# EAGLE board esp_teensy_bridge (EAGLE 9.6.2)
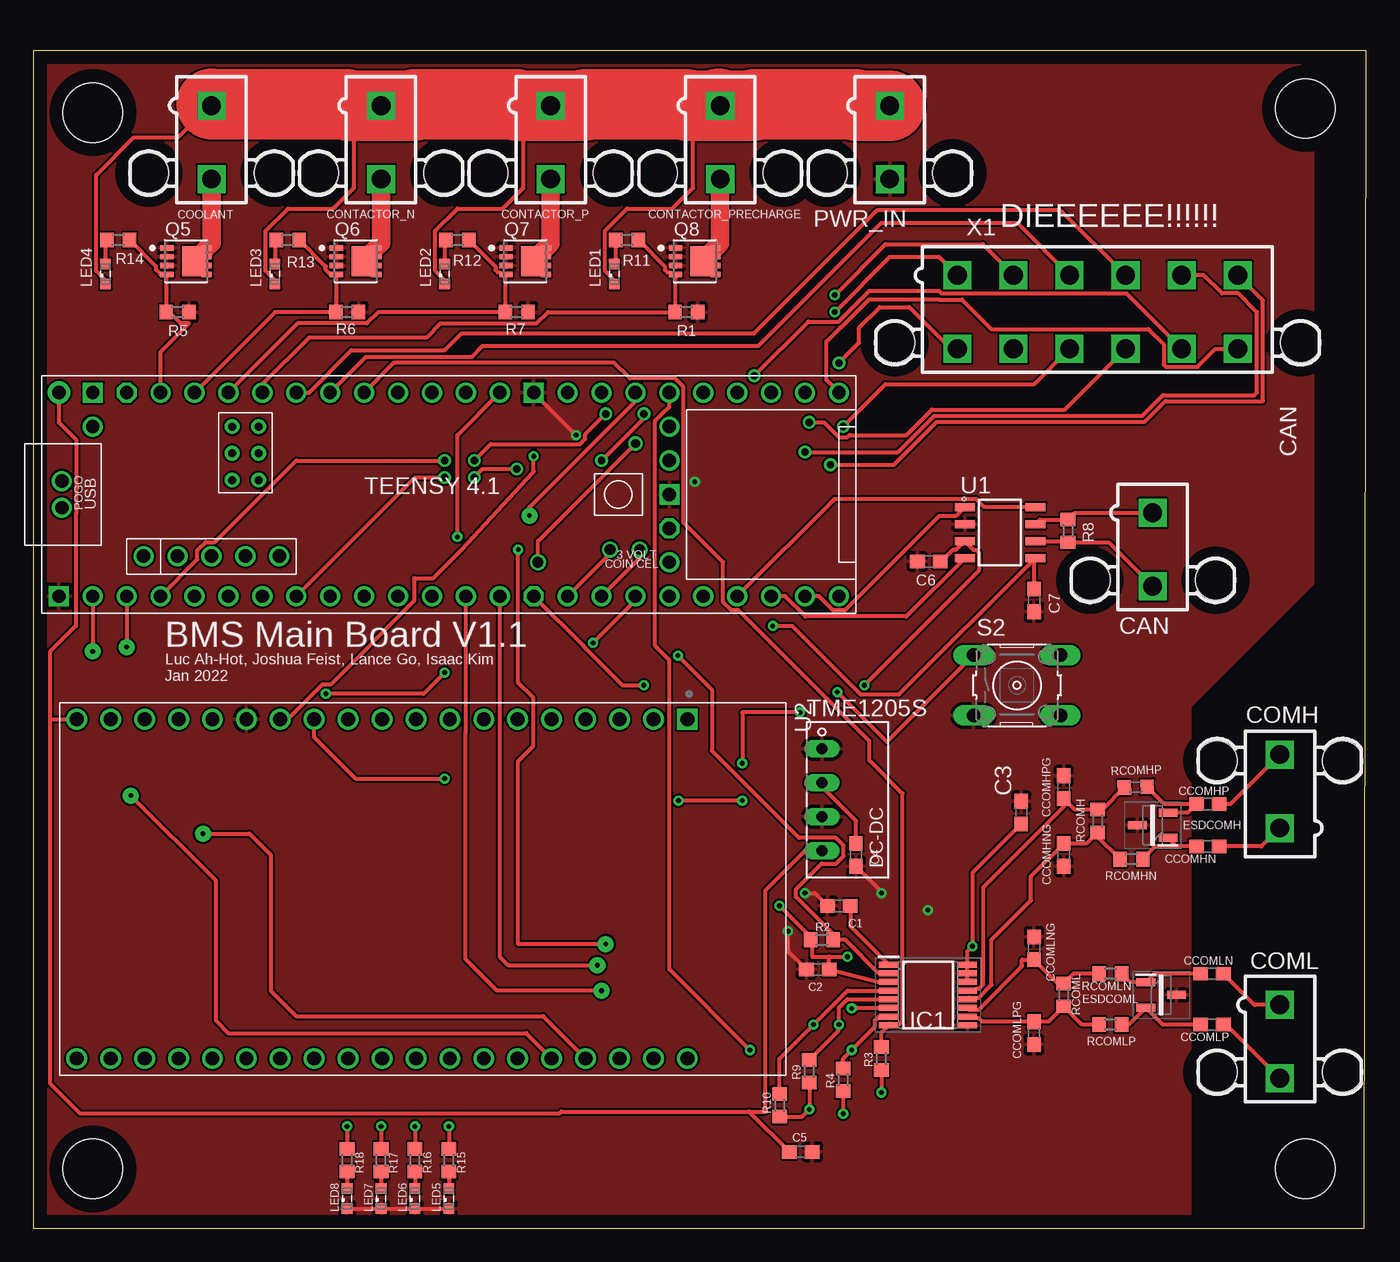
[diagram p0: board, top side]
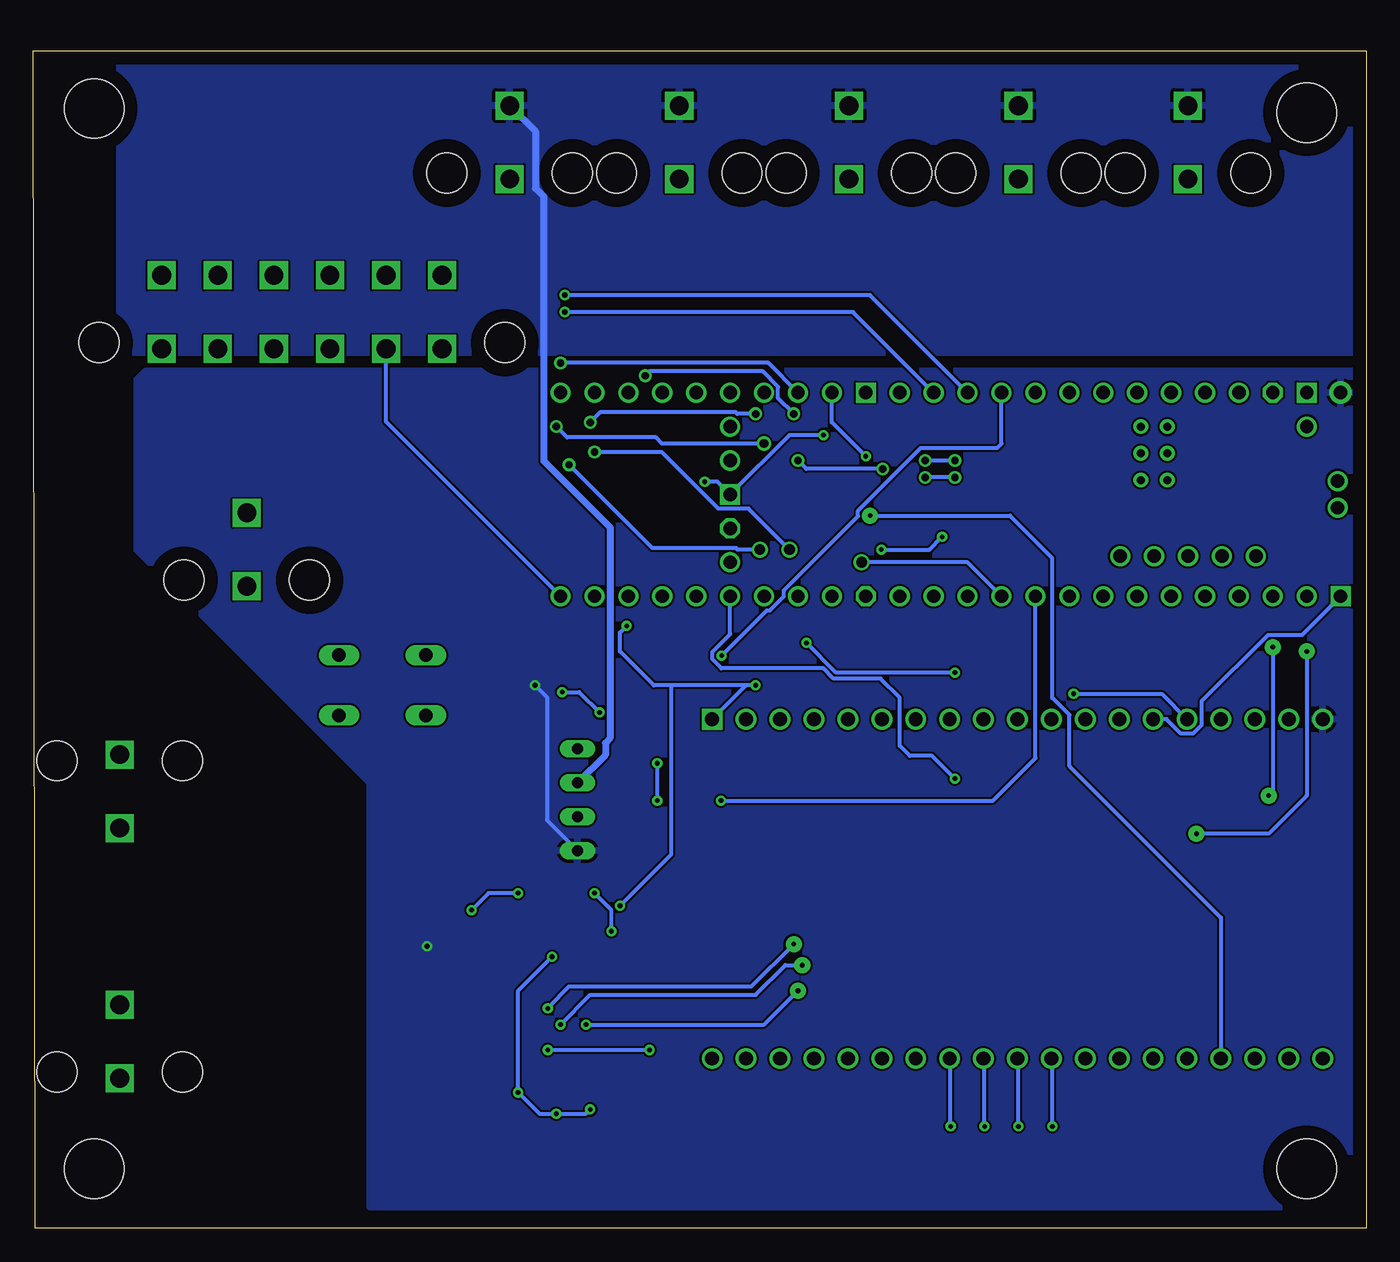
[diagram p1: board, bottom side, seen from below]

Size 99.8 x 88.13 mm. Coordinates in mm from the lower left corner, seen from the top.
Outline: 0,0 99.67,0 99.8,88.13 0,88.13 0,0
Copper layers (1*16): Top 0.035mm / dielectric 1.5mm / Bottom 0.035mm
Design rules "default *": minimum track width 6mil, minimum drill 0.35mm, track to track 6mil, track to pad 6mil, pad to pad 6mil, via to via 6mil, smd to smd 6mil, copper to edge 40mil, drill to drill 6mil, minimum pad ring 10mil, minimum via ring 8mil, stop-mask expansion 4mil, vias tented up to drill 0mil, thermal gap 10mil
Holes 4.45 mm at 4.45,4.45 95.25,4.45 95.25,83.82 4.45,83.5

## Footprints (pad centres in the part's own frame; a part is rotated, then mirrored left to right if it is on the bottom)
C0603 = smd 1.1 x 1: 1 -0.85,0; 2 0.85,0
5566-2 = drill 1.4 square: 1 0,-2.75; 2 0,2.75 | hole 3: 4.7,2.29; -4.7,2.29
SOT95P255X150-3N = smd 1.4 x 0.6: 1 -1.15,0.95; 2 -1.15,-0.95; 3 1.15,0
SOP65P640X120-16N = smd 1.475 x 0.45: 1 -2.938,2.275; 2 -2.938,1.625; 3 -2.938,0.975; 4 -2.938,0.325; 5 -2.938,-0.325; 6 -2.938,-0.975; 7 -2.938,-1.625; 8 -2.938,-2.275; 9 2.938,-2.275; 10 2.938,-1.625; 11 2.938,-0.975; 12 2.938,-0.325; 13 2.938,0.325; 14 2.938,0.975; 15 2.938,1.625; 16 2.938,2.275
SML0603 = smd 0.8 x 0.8: A 0.75,0; C -0.75,0
VISHAY_SIS862DN-T1-GE3_0 = smd 0.99 x 0.405: 1 -1.435,0.99; 2 -1.435,0.33; 3 -1.435,-0.33; 4 -1.435,-0.99 | smd 0.76 x 0.405: 5,6,7,8 1.55,-0.99; 5,6,7,8-2 1.55,-0.33; 5,6,7,8-3 1.55,0.33; 5,6,7,8-4 1.55,0.99 | smd 1.725 x 2.235: 5,6,7,8-5 0.557,0
R0603 = smd 1 x 1.1: 1 -0.85,0; 2 0.85,0
B3F-10XX = drill 1.016 long: 1 -3.251,2.261; 2 3.251,2.261; 3 -3.251,-2.261; 4 3.251,-2.261
NME = drill 0.813 long: 1 0,3.81; 2 0,1.27; 3 0,-1.27; 4 0,-3.81
SOIC127P600X175-8N = smd 1.5 x 0.6: 1 -2.65,1.905; 2 -2.65,0.635; 3 -2.65,-0.635; 4 -2.65,-1.905; 5 2.65,-1.905; 6 2.65,-0.635; 7 2.65,0.635; 8 2.65,1.905
MODULE_ESP32-DEVKITC-32D = drill 1.04 square: 1 -12.7,19.76 | drill 1.04: 2 -12.7,17.22; 3 -12.7,14.68; 4 -12.7,12.14; 5 -12.7,9.6; 6 -12.7,7.06; 7 -12.7,4.52; 8 -12.7,1.98; 9 -12.7,-0.56; 10 -12.7,-3.1; 11 -12.7,-5.64; 12 -12.7,-8.18; 13 -12.7,-10.72; 14 -12.7,-13.26; 15 -12.7,-15.8; 16 -12.7,-18.34; 17 -12.7,-20.88; 18 -12.7,-23.42; 19 -12.7,-25.96; 20 12.7,19.76; 21 12.7,17.22; 22 12.7,14.68; 23 12.7,12.14; 24 12.7,9.6; 25 12.7,7.06; 26 12.7,4.52; 27 12.7,1.98; 28 12.7,-0.56; 29 12.7,-3.1; 30 12.7,-5.64; 31 12.7,-8.18; 32 12.7,-10.72; 33 12.7,-13.26; 34 12.7,-15.8; 35 12.7,-18.34; 36 12.7,-20.88; 37 12.7,-23.42; 38 12.7,-25.96
TEENSY41 = drill 1: 0-RX1/CS1/CRX2 -27.94,-7.62; 1-TX1/MISO1/CTX2 -25.4,-7.62; 2-OUT2 -22.86,-7.62; 3-LRCLK2 -20.32,-7.62; 4-BCLK2 -17.78,-7.62; 5-IN2 -15.24,-7.62; 6-OUT1D -12.7,-7.62; 7-RX2/OUT1A -10.16,-7.62; 8-TX2/IN1 -7.62,-7.62; 9-OUT1C -5.08,-7.62; 10-CS\MQSR -2.54,-7.62; 11-MOSI/CTX1 0,-7.62; 12-MISO/MQSL 2.54,-7.62; 13-SCK/LED 2.54,7.62; 14-A0/TX3/SPDIF_OUT 0,7.62; 15-A1/RX3/SPDIF_IN -2.54,7.62; 16-A2/RX4/SCL1 -5.08,7.62; 17-A3/TX4/SDA1 -7.62,7.62; 18-A4/SDA0 -10.16,7.62; 19-A5/SCL0 -12.7,7.62; 20-A6/TX5/LRCLK1 -15.24,7.62; 21-A7/RX5/BCLK1 -17.78,7.62; 22-A8/CTX1 -20.32,7.62; 23-A9/CRX1/MCLK1 -22.86,7.62; 24-A10/TX6/SCL2 7.62,-7.62; 25-A11/RX6/SDA2 10.16,-7.62; 26-A12/MOSI1 12.7,-7.62; 27-A13/SCK1 15.24,-7.62; 28-RX7 17.78,-7.62; 29-TX7 20.32,-7.62; 30-CRX3 22.86,-7.62; 31-CTX3 25.4,-7.62; 32-OUT1B 27.94,-7.62; 33-MCLK2 27.94,7.62; 34-RX8 25.4,7.62; 35-TX8 22.86,7.62; 36-PWM 20.32,7.62; 37-PWM 17.78,7.62; 38-A14/CS/IN1 15.24,7.62; 39-A15/CS/OUT1A 12.7,7.62; 40-A16/CS1 10.16,7.62; 41-A17/MISO1 7.62,7.62; +5V -24.13,-4.62; D+ -30.25,-1; D- -30.25,1; DM -21.59,-4.62; DP -19.05,-4.62; GND4 -16.51,-4.62; GND5 -13.97,-4.62; ON/OFF 15.24,5.08; PROGRAM 15.24,2.54; VBAT 15.24,-5.08; VUSB -27.94,5.08 | drill 1 octagon: 3V3-1 5.08,-7.62; 3V3-2 15.24,-2.54; 3V3-3 -25.4,7.62 | drill 0.6: G -15.51,3.08; LED -17.51,3.08; R+ -17.51,5.08; R- -15.51,5.08; T+ -15.51,1.08; T- -17.51,1.08 | drill 1 square: GND1 -30.48,-7.62; GND2 15.24,0; GND3 5.08,7.62; GND6 -27.94,7.62 | drill 1 pad 1.676: VIN -30.48,7.62
5566-12 = drill 1.4 square: 1 10.5,-2.75; 2 6.3,-2.75; 3 2.1,-2.75; 4 -2.1,-2.75; 5 -6.3,-2.75; 6 -10.5,-2.75; 7 10.5,2.75; 8 6.3,2.75; 9 2.1,2.75; 10 -2.1,2.75; 11 -6.3,2.75; 12 -10.5,2.75 | hole 3: 15.2,2.29; -15.2,2.29

## Placement (x,y rotation side)
C1  0.22μF  [C0603]  60.33,24.13 180 top
C2  0.1μF  [C0603]  58.74,19.37 180 top
C3  0.22uF  [C0603]  73.98,31.11 270 top
C4  0.1μF  [C0603]  61.59,27.94 270 top
C5  0.22μF  [C0603]  57.47,5.71 0 top
C6  0.1μF  [C0603]  67.06,49.91 180 top
C7  0.1μF  [C0603]  74.93,46.99 270 top
CAN  5566-2  [5566-2]  83.82,50.8 180 top
CCOMHN  2.2nf  [C0603]  87.95,28.57 180 top
CCOMHNG  220 pF  [C0603]  77.15,27.94 90 top
CCOMHP  2.2nf  [C0603]  87.95,31.75 180 top
CCOMHPG  220 pF  [C0603]  77.15,33.02 270 top
CCOMLN  2.2nf  [C0603]  88.27,19.05 180 top
CCOMLNG  220 pF  [C0603]  74.93,20.95 270 top
CCOMLP  2.2nf  [C0603]  88.27,15.24 180 top
CCOMLPG  220 pF  [C0603]  74.93,14.61 90 top
COMH  5566-2  [5566-2]  93.34,32.7 0 top
COML  5566-2  [5566-2]  93.34,13.97 180 top
CONTACTOR_N  5566-2  [5566-2]  26.04,81.28 180 top
CONTACTOR_P  5566-2  [5566-2]  38.73,81.28 180 top
CONTACTOR_PRECHARGE  5566-2  [5566-2]  51.44,81.28 180 top
COOLANT  5566-2  [5566-2]  13.34,81.28 180 top
ESDCOMH  ESDAVLC6-2BLY  [SOT95P255X150-3N]  83.82,30.16 180 top
ESDCOML  ESDAVLC6-2BLY  [SOT95P255X150-3N]  84.45,17.46 0 top
IC1  BQ79600PWRQ1  [SOP65P640X120-16N]  66.99,17.46 0 top
LED1  [SML0603]  43.5,71.44 90 top
LED2  [SML0603]  30.8,71.44 90 top
LED3  [SML0603]  18.1,71.44 90 top
LED4  [SML0603]  5.4,71.44 90 top
LED5  [SML0603]  31.11,2.22 90 top
LED6  [SML0603]  28.57,2.22 90 top
LED7  [SML0603]  26.04,2.22 90 top
LED8  [SML0603]  23.5,2.22 90 top
PWR_IN  5566-2  [5566-2]  64.14,81.28 180 top
Q5  VISHAY_SIS862DN-T1-GE3VISHAY_SIS862DN-T1-GE3_0_0  [VISHAY_SIS862DN-T1-GE3_0]  11.43,72.39 0 top
Q6  VISHAY_SIS862DN-T1-GE3VISHAY_SIS862DN-T1-GE3_0_0  [VISHAY_SIS862DN-T1-GE3_0]  24.13,72.39 0 top
Q7  VISHAY_SIS862DN-T1-GE3VISHAY_SIS862DN-T1-GE3_0_0  [VISHAY_SIS862DN-T1-GE3_0]  36.83,72.39 0 top
Q8  VISHAY_SIS862DN-T1-GE3VISHAY_SIS862DN-T1-GE3_0_0  [VISHAY_SIS862DN-T1-GE3_0]  49.53,72.39 0 top
R1  10k  [R0603]  48.9,68.58 180 top
R2  100k  [R0603]  59.05,21.59 0 top
R3  100k  [R0603]  63.5,12.7 90 top
R4  10k  [R0603]  60.64,11.11 90 top
R5  10k  [R0603]  10.79,68.58 180 top
R6  10k  [R0603]  23.5,68.58 180 top
R7  10k  [R0603]  36.2,68.58 180 top
R8  120  [R0603]  77.47,52.2 270 top
R9  10k  [R0603]  58.1,11.75 90 top
R10  10k  [R0603]  55.88,9.21 90 top
R11  10k  [R0603]  44.45,73.98 180 top
R12  10k  [R0603]  31.75,73.98 180 top
R13  10k  [R0603]  19.05,73.98 180 top
R14  10k  [R0603]  6.35,73.98 180 top
R15  50  [R0603]  31.11,5.08 270 top
R16  50  [R0603]  28.57,5.08 270 top
R17  50  [R0603]  26.04,5.08 270 top
R18  50  [R0603]  23.5,5.08 270 top
RCOMH  1k  [R0603]  79.69,30.48 90 top
RCOMHN  49  [R0603]  82.23,27.62 180 top
RCOMHP  49  [R0603]  82.55,33.02 181.8 top
RCOML  1k  [R0603]  77.15,17.46 270 top
RCOMLN  49  [R0603]  80.64,19.05 180 top
RCOMLP  49  [R0603]  80.64,15.24 180 top
S2  [B3F-10XX]  73.66,40.64 0 top
TME1205S  [NME]  59.05,32.07 0 top
U1  MCP2562-E/SN  [SOIC127P600X175-8N]  72.39,52.07 0 top
U2  ESP32-DEVKITC-32D  [MODULE_ESP32-DEVKITC-32D]  29.21,25.4 270 top
U$3  TEENSY41  [TEENSY41]  32.38,54.93 0 top
X1  5566-12  [5566-12]  79.69,68.58 180 top

## Library data of the parts
C1-C7 CCOMHN CCOMHNG CCOMHP CCOMHPG CCOMLN CCOMLNG CCOMLP CCOMLPG = rcl; SPICEPREFIX: C
CAN COMH COML CONTACTOR_N CONTACTOR_P CONTACTOR_PRECHARGE COOLANT PWR_IN = con-molex; MF: MOLEX; OC_FARNELL: 1822072; OC_NEWARK: unknown
ESDCOMH ESDCOML = ESDAVLC6-2BLY; DESCRIPTION: STMICROELECTRONICS - ESDAVLC6-2BLY - ESD Protection Device, 17 V, SOT-23, 3 Pins, 5 V, 140 W, ESDA Transil Series; HEIGHT: 1.5mm; MANUFACTURER_NAME: STMicroelectronics; MANUFACTURER_PART_NUMBER: ESDAVLC6-2BLY; MOUSER_PART_NUMBER: 511-ESDAVLC6-2BLY; MOUSER_PRICE-STOCK: https://www.mouser.co.uk/ProductDetail/STMicroelectronics/ESDAVLC6-2BLY?qs=l7cgNqFNU1iH2e21evvYsA%3D%3D
IC1 = BQ79600; DESCRIPTION: Battery Management Automotive SPI/UART communication interface functional-safety compliant with automatic host wakeup; HEIGHT: 1.2mm; MANUFACTURER_NAME: Texas Instruments; MANUFACTURER_PART_NUMBER: BQ79600PWRQ1; MOUSER_PART_NUMBER: 595-BQ79600PWRQ1; MOUSER_PRICE-STOCK: https://www.mouser.co.uk/ProductDetail/Texas-Instruments/BQ79600PWRQ1?qs=bAKSY%2FctAC74v4PXQeVHrA%3D%3D
LED1-LED8 = led
Q5-Q8 = Vishay - SIS862DN-T1-GE3; CENTROID_NOT_SPECIFIED: No; CONTINUOUS_DRAIN_CURRENT: 40A; DATASHEET: http://www.vishay.com/docs/63346/sis862dn.pdf; DEVICE_CLASS_L1: Discrete Semiconductors; DEVICE_CLASS_L2: Transistors; DEVICE_CLASS_L3: MOSFETs; DIGIKEY_DESCRIPTION: TRANS MOSFET N-CH 60V 40A 1212; DIGIKEY_PART_NUMBER: SIS862DN-T1-GE3CT-ND; DRAIN_TO_SOURCE_BREAKDOWN_VOLTAGE: 60V; DRAIN_TO_SOURCE_RESISTANCE: 0.007Ω; DRAIN_TO_SOURCE_VOLTAGE: 60V; GATE_TO_SOURCE_VOLTAGE: 20V; HEIGHT: 1.12mm; INPUT_CAPACITACE_AT_VDS: 1320pF @ 30V; LEAD_FREE: yes; MAX_JUNCTION_TEMP: +150°C; MF: Vishay; MFG_PACKAGE_IDENT: S16-2667; MFG_PACKAGE_IDENT_DATE: 01/2017; MFG_PACKAGE_IDENT_REV: M; MOUSER_DESCRIPTION: N-Channel 60 V 8.5 mOhm 52 W TrenchFET Power Mosfet - PowerPAK 1212-8; MOUSER_PART_NUMBER: 78-SIS862DN-T1-GE3; MPN: SIS862DN-T1-GE3; NUMBER_OF_CHANNELS: 1; NUMBER_OF_N_CHANNELS: 1; PACKAGE: PowerPAK1212-8; POWER_DISSIPATION: 52W; PREFIX: Q; ROHS: yes; STANDOFF_HEIGHT: 0mm; TECHNOLOGY: MOSFET; TEMPERATURE_RANGE_HIGH: +150°C; TEMPERATURE_RANGE_LOW: -55°C; THRESHOLD_VGS: 2.6V; TURN_OFF_DELAY_TIME: 15ns; TURN_ON_DELAY_TIME: 23ns; VERIFICATION_VERSION: 0.0.0.1
R1-R18 RCOMH RCOMHN RCOMHP RCOML RCOMLN RCOMLP = rcl; SPICEPREFIX: R
S2 = switch-omron; MPN: B3F-1000; OC_FARNELL: 176432; OC_NEWARK: 36M3542
TME1205S = dc-dc-converter; MF: C & D TECHNOLOGIES, INC; MPN: NME1205D; OC_FARNELL: 1021466; OC_NEWARK: 98B8198
U1 = MCP2562-E_SN; AVAILABILITY: In Stock; DESCRIPTION: Microchip MCP2562-E/SN, CAN Transceiver 1MBps 1-channel IEC 61000-4-2, 8-Pin SOIC; MF: Microchip; MP: MCP2562-E/SN; PACKAGE: SO-8 Microchip; PRICE: None; PURCHASE-URL: https://pricing.snapeda.com/search/part/MCP2562-E/SN/?ref=eda
U2 = ESP32-DEVKITC-32D; AVAILABILITY: In Stock; DESCRIPTION: WiFi Development Tools (802.11) ESP32 General Development Kit, ESP32-WROOM-32D on the board; MF: Espressif Systems; MP: ESP32-DEVKITC-32D; PACKAGE: None; PRICE: None; PURCHASE-URL: https://pricing.snapeda.com/search/part/ESP32-DEVKITC-32D/?ref=eda
U$3 = teensy
X1 = con-molex; MF: MOLEX; OC_FARNELL: unknown; OC_NEWARK: unknown

## Nets
3V3: C2.1 C7.1 IC1.3 R2.1 R3.1 R4.1 R9.1 R10.1 U1.5 U2.1 U$3.3V3-1
5V: C3.2 C5.1 C6.1 IC1.14 IC1.15 IC1.16 TME1205S.4 U1.3 U2.19 U$3.VIN
CANH: CAN.1 R8.1 U1.7
CANL: CAN.2 R8.2 U1.6
COMHN: CCOMHNG.2 IC1.12 RCOMH.1 RCOMHN.2
COMHN_ISO: CCOMHN.1 COMH.1
COMHP: CCOMHPG.2 IC1.13 RCOMH.2 RCOMHP.2
COMHP_ISO: CCOMHP.1 COMH.2
COMLN: CCOMLNG.2 IC1.11 RCOML.1 RCOMLN.2
COMLN_ISO: CCOMLN.1 COML.1
COMLP: CCOMLPG.2 IC1.10 RCOML.2 RCOMLP.2
COMLP_ISO: CCOMLP.1 COML.2
CONTACTORN_CTRL: Q6.4 R6.2 R13.1 U$3.22-A8/CTX1
CONTACTORP_CTRL: Q7.4 R7.2 R12.1 U$3.21-A7/RX5/BCLK1
CONTACTORPRECHARGE_CTRL: Q8.4 R1.2 R11.1 U$3.20-A6/TX5/LRCLK1
COOLANT_CTRL: Q5.4 R5.2 R14.1 U$3.23-A9/CRX1/MCLK1
CRX: U1.4 U$3.30-CRX3
CS0: IC1.7 R4.2 U$3.38-A14/CS/IN1
CS1: U2.35 U$3.39-A15/CS/OUT1A
CSTBY: U1.8 U$3.29-TX7
CTX: U1.1 U$3.31-CTX3
GND: C1.2 C2.2 C3.1 C4.2 C5.2 C6.2 C7.2 CCOMHNG.1 CCOMHPG.1 CCOMLNG.1 CCOMLPG.1 ESDCOMH.3 ESDCOML.3 IC1.9 LED5.C LED6.C LED7.C LED8.C PWR_IN.2 Q5.1 Q5.2 Q5.3 Q6.1 Q6.2 Q6.3 Q7.1 Q7.2 Q7.3 Q8.1 Q8.2 Q8.3 R1.1 R5.1 R6.1 R7.1 S2.3 TME1205S.1 TME1205S.3 U1.2 U2.14 U$3.GND1 U$3.GND2 U$3.GND3
GND2: U2.26
GND3: U2.20
MISO: IC1.5 R9.2 U$3.12-MISO/MQSL
MISO_ESP: U2.13 U$3.41-A17/MISO1
MOSI: IC1.4 R10.2 U$3.11-MOSI/CTX1
MOSI_ESP: U2.15 U$3.26-A12/MOSI1
N$1: C1.1 IC1.1
N$2: CONTACTOR_N.2 Q6.5,6,7,8 Q6.5,6,7,8-2 Q6.5,6,7,8-3 Q6.5,6,7,8-4 Q6.5,6,7,8-5
N$3: LED1.A R11.2
N$4: LED2.A R12.2
N$5: COOLANT.2 Q5.5,6,7,8 Q5.5,6,7,8-2 Q5.5,6,7,8-3 Q5.5,6,7,8-4 Q5.5,6,7,8-5
N$6: CONTACTOR_PRECHARGE.2 Q8.5,6,7,8 Q8.5,6,7,8-2 Q8.5,6,7,8-3 Q8.5,6,7,8-4 Q8.5,6,7,8-5
N$7: S2.1 U$3.8-TX2/IN1
N$9: LED3.A R13.2
N$10: CCOMLP.2 ESDCOML.2 RCOMLP.1
N$11: CCOMLN.2 ESDCOML.1 RCOMLN.1
N$12: CONTACTOR_P.2 Q7.5,6,7,8 Q7.5,6,7,8-2 Q7.5,6,7,8-3 Q7.5,6,7,8-4 Q7.5,6,7,8-5
N$13: LED4.A R14.2
N$14: U$3.14-A0/TX3/SPDIF_OUT X1.1
N$15: CCOMHP.2 ESDCOMH.2 RCOMHP.1
N$16: CCOMHN.2 ESDCOMH.1 RCOMHN.1
N$17: U$3.15-A1/RX3/SPDIF_IN X1.2
N$18: U$3.18-A4/SDA0 X1.3
N$19: U$3.19-A5/SCL0 X1.4
N$20: U$3.24-A10/TX6/SCL2 X1.5
N$21: U$3.25-A11/RX6/SDA2 X1.6
N$22: U$3.40-A16/CS1 X1.7
N$23: U$3.32-OUT1B X1.8
N$24: U$3.9-OUT1C X1.9
N$25: U$3.6-OUT1D X1.10
N$26: U$3.33-MCLK2 X1.12
N$27: U$3.2-OUT2 X1.11
N$28: R15.1 U2.27
N$29: R16.1 U2.28
N$30: R17.1 U2.29
N$31: R18.1 U2.30
N$32: LED5.A R15.2
N$33: LED6.A R16.2
N$34: LED7.A R17.2
N$35: LED8.A R18.2
NFAULT: IC1.2 R2.2 U$3.16-A2/RX4/SCL1
RX_ESP: U2.24 U$3.1-TX1/MISO1/CTX2
SCK: IC1.6 U$3.13-SCK/LED
SCK_ESP: U2.12 U$3.27-A13/SCK1
SPI_RDY: IC1.8 R3.2 U$3.17-A3/TX4/SDA1
TX_ESP: U2.23 U$3.0-RX1/CS1/CRX2
VCC: C4.1 CONTACTOR_N.1 CONTACTOR_P.1 CONTACTOR_PRECHARGE.1 COOLANT.1 LED1.C LED2.C LED3.C LED4.C PWR_IN.1 TME1205S.2

## Tracks (layer width: path | path; a pad name or v marks a point on that pad's centre or on a via)
3V3  (via drill 0.35)
  Top 0.305: R3.1 v63.5,10.16 | R4.1 v60.64,8.57 | R9.1 v58.1,8.89 57.57,8.36 R10.1 | IC1.3 63.26,18.44 C2.1 59.59,20.32 | 59.59,20.32 58.32,20.32 58.32,21.48 R2.1 58.2,21.8 v55.87,24.14 | 59.59,20.32 v60.96,20.32 | U$3.3V3-1 41.23,43.55 41.23,43.53 44.12,40.64 v45.72,40.64 | v55.37,45.09 56.82,45.09 61.95,39.96 64.83,39.96 U1.5 74.93,50.05 C7.1
  Bottom 0.305: 52.07,40.64 v45.72,40.64 46.43,40.64 U2.1 | 52.07,40.64 53.34,40.64 55.88,43.18 55.88,44.58 v55.37,45.09 | 52.07,40.64 52.07,27.94 v55.87,24.14 | v58.1,8.89 58.42,8.57 v60.64,8.57 61.91,8.57 v63.5,10.16 63.5,17.78 v60.96,20.32
5V  (via drill 0.35)
  Top 0.305: 53.6,8.73 39.53,8.73 39.37,8.57 3.49,8.57 1.27,10.79 1.27,38.1 | 53.6,8.73 54.87,8.73 54.82,8.78 54.82,25.29 57.78,28.26 TME1205S.4 | 53.6,8.73 C5.1 | IC1.14 IC1.15 IC1.16 69.93,20.72 v70.32,21.11 70.32,26.61 C3.2 | 1.27,38.1 1.27,43.18 3.17,45.09 3.17,53.47 3.19,53.49 3.19,59.04 1.91,60.33 U$3.VIN | v62.23,40.64 70.8,49.2 70.8,50.59 70.62,50.77 70.41,50.77 U1.3 69.08,50.77 68.86,50.77 68,49.91 C6.1 | 1.27,38.1 U2.19
  Bottom 0.305: v62.23,40.64 61.34,39.75 61.34,30.54 TME1205S.4
  pour Bottom: 0,64.14 91.44,64.14 92.08,63.5 92.08,50.8 74.61,33.34 74.61,1.59 1.27,1.59 0,2.86
CANH
  Top 0.305: U1.7 75.38,53.05 R8.1 77.97,53.55 CAN.1
CANL
  Top 0.305: U1.6 77.38,51.44 R8.2 80.52,51.35 CAN.2
COMHN
  Top 0.305: RCOMHN.2 79.69,29.31 RCOMH.1 78.85,28.79 CCOMHNG.2 74.71,26.34 74.71,24.54 71.75,21.59 71.75,18.22 70.79,17.26 70.05,17.26 IC1.12
COMHN_ISO
  Top 0.305: COMH.1 91.97,28.57 CCOMHN.1
COMHP
  Top 0.305: RCOMHP.2 80.04,31.33 RCOMH.2 77.99,31.33 CCOMHPG.2 77.15,31.54 71.12,25.5 71.12,18.23 70.79,17.91 70.61,17.91 70.48,17.78 IC1.13
COMHP_ISO
  Top 0.305: COMH.2 89.64,31.75 CCOMHP.1
COMLN
  Top 0.305: RCOMLN.2 77.89,19.05 RCOML.1 76.72,18.31 CCOMLNG.2 74.04,20.11 74.04,19.61 70.79,16.37 70.05,16.37 IC1.11
COMLN_ISO
  Top 0.305: COML.1 91.44,16.72 CCOMLN.1
COMLP
  Top 0.305: RCOMLP.2 78.53,15.24 RCOML.2 76,15.46 CCOMLPG.2 71.06,15.46 70.79,15.72 70.05,15.72 IC1.10
COMLP_ISO
  Top 0.305: COML.2 89.33,15.24 CCOMLP.1
CONTACTORN_CTRL
  Top 0.305: U$3.22-A8/CTX1 18.1,68.58 R6.2 22.7,68.63 Q6.4 22.23,71.4 21.89,71.73 21.89,71.98 R13.1
CONTACTORP_CTRL
  Top 0.305: U$3.21-A7/RX5/BCLK1 19.78,67.72 24.97,67.72 25.83,68.58 R7.2 35.34,71.12 | 35.34,71.12 35.34,71.35 Q7.4 | R12.1 34.59,71.98 34.59,71.73 34.77,71.55 34.91,71.55 35.34,71.12
CONTACTORPRECHARGE_CTRL
  Top 0.305: U$3.20-A6/TX5/LRCLK1 17.14,63.18 20.64,66.67 29.43,66.67 30.48,67.72 37.67,67.72 38.53,68.58 R1.2 48.09,68.63 48.09,71.12 | 48.09,71.12 Q8.4 | R11.1 47.3,71.98 47.3,71.73 47.47,71.55 47.66,71.55 48.09,71.12
COOLANT_CTRL
  Top 0.305: U$3.23-A9/CRX1/MCLK1 9.53,65.6 11.65,67.72 11.02,67.72 10.16,68.58 R5.2 9.99,68.63 Q5.4 9.53,71.4 9.2,71.73 9.2,71.98 R14.1
CRX
  Top 0.305: U$3.30-CRX3 56.29,47.31 57.8,45.79 65.37,45.79 U1.4
CS0  (via drill 0.35)
  Top 0.305: IC1.7 63.31,15.84 63.01,15.54 63.01,15.07 v61.28,13.34 60.64,12.7 R4.2 | v53.66,13.34 47.62,19.37 47.62,42.53 46.57,43.59 46.57,60.45 47.03,60.91 | U$3.38-A14/CS/IN1 47.62,61.51 47.03,60.91 | 47.03,60.91
  Bottom 0.305: v53.66,13.34 v61.28,13.34
CS1  (via drill 0.35 pad 1.2)
  Top 0.305: U$3.39-A15/CS/OUT1A 45.09,61.91 37.15,53.98 v37.15,53.34
  Bottom 0.305: v37.15,53.34 26.67,53.34 23.5,50.16 23.5,39.71 22.21,38.43 22.21,34.6 10.87,23.25 U2.35
CSTBY
  Top 0.305: U1.8 71.22,53.98 70.62,54.58 59.98,54.58 U$3.29-TX7
CTX
  Top 0.305: U1.1 69.08,53.31 67.83,53.31 60.76,46.25 59.89,46.25 58.83,47.31 U$3.31-CTX3
GND  (via drill 0.35)
  Top 0.305: U$3.GND3 v40.64,59.37 | C4.2 63.5,25.18 v63.5,25.08 | C2.2 56.52,20.74 v56.52,22.23 | v57.78,25.08 58.52,25.08 C1.2 | LED8.C LED7.C LED6.C LED5.C
  Bottom 0.305: v40.64,59.37 43.18,59.37 U$3.GND2 48.58,55.88 v49.53,55.88 | v63.5,25.08 65.72,25.08 v66.99,23.81 | v56.52,22.23 56.52,23.81 v57.78,25.08 | U$3.GND1 4.81,44.4 7.36,44.4 12.32,39.44 12.32,37.65 12.96,37.02 13.86,37.02 14.94,38.1 U2.14
  pour Top: 0,0.32 86.68,0.32 86.68,39.05 95.89,48.26 95.89,87.95 95.57,88.27 0,88.27
MISO  (via drill 0.35, 0.35 pad 1.2)
  Top 0.305: IC1.5 60.97,17.14 60.33,16.5 v60.33,15.24 60.33,14.82 R9.2 | v42.23,19.68 35.56,19.68 34.91,20.33 34.91,37.16 34.92,37.17 U$3.12-MISO/MQSL
  Bottom 0.305: v60.33,15.24 58.1,17.46 45.72,17.46 43.5,19.68 v42.23,19.68
MISO_ESP  (via drill 0.35)
  Top 0.305: v37.47,57.78 37.47,56.63 32.07,50.8 29.93,48.67 28.55,48.67 28.55,46.99 22.24,40.69 21.62,40.69 19.04,38.1 U2.13
  Bottom 0.305: v37.47,57.78 40.01,60.33 U$3.41-A17/MISO1
MOSI  (via drill 0.35, 0.35 pad 1.2)
  Top 0.305: IC1.4 60.97,17.79 v58.42,15.24 55.88,12.7 R10.2 | v42.55,17.78 34.72,17.78 32.38,20.12 32.38,37.16 32.38,37.17 U$3.11-MOSI/CTX1
  Bottom 0.305: v42.55,17.78 45.09,15.24 v58.42,15.24
MOSI_ESP  (via drill 0.35)
  Top 0.305: v21.91,40.01 29.21,40.01 v30.8,41.59 | v41.91,43.81 45.09,46.99 U$3.26-A12/MOSI1
  Bottom 0.305: v30.8,41.59 39.69,41.59 v41.91,43.81 | U2.15 15.31,40.01 v21.91,40.01
N$1
  Top 0.305: C1.1 61.17,22.62 IC1.1
N$2
  Top 0.305: Q6.5,6,7,8-2 Q6.5,6,7,8-3 Q6.5,6,7,8-4 | Q6.5,6,7,8-2 25.35,72.39 Q6.5,6,7,8-5 Q6.5,6,7,8-4 | Q6.5,6,7,8 Q6.5,6,7,8-2
  Top 1.372: CONTACTOR_N.2 26.04,73.74 Q6.5,6,7,8-4 Q6.5,6,7,8-5
N$3
  Top 0.305: R11.2 43.6,72.29 LED1.A
N$4
  Top 0.305: R12.2 30.8,73.88 LED2.A
N$5
  Top 0.305: Q5.5,6,7,8-2 Q5.5,6,7,8-3 Q5.5,6,7,8-4 | Q5.5,6,7,8-5 12.65,72.39 Q5.5,6,7,8-2 | Q5.5,6,7,8 Q5.5,6,7,8-2
  Top 1.372: COOLANT.2 13.34,73.74 Q5.5,6,7,8-4 Q5.5,6,7,8-5
N$6
  Top 0.305: Q8.5,6,7,8-2 Q8.5,6,7,8-3 Q8.5,6,7,8-4 | Q8.5,6,7,8-2 50.75,72.39 Q8.5,6,7,8-5 | Q8.5,6,7,8 Q8.5,6,7,8-2
  Top 1.372: CONTACTOR_PRECHARGE.2 51.44,73.74 Q8.5,6,7,8-4 Q8.5,6,7,8-5
N$7  (via drill 0.35)
  Top 0.305: v60.2,40.13 63.92,36.41 S2.1 | v57.41,38.61 53.09,38.61 v53.09,34.8 | v53.09,32 v48.31,32 48.26,32
  Bottom 0.305: v60.2,40.13 58.93,40.13 v57.4,38.61 v57.41,38.61 | v53.09,34.8 v53.09,32 | v48.31,32 27.94,32 24.77,35.18 U$3.8-TX2/IN1
N$9
  Top 0.305: R13.2 18.1,73.88 LED3.A
N$10
  Top 0.305: CCOMLP.2 84.58,15.24 ESDCOML.2 82.03,15.24 RCOMLP.1
N$11
  Top 0.305: CCOMLN.2 83.94,19.05 ESDCOML.1 82.13,18.41 RCOMLN.1
N$12
  Top 0.305: Q7.5,6,7,8-2 38.05,72.39 Q7.5,6,7,8-5 Q7.5,6,7,8-4 | Q7.5,6,7,8 Q7.5,6,7,8-2 | Q7.5,6,7,8-4 Q7.5,6,7,8-3 Q7.5,6,7,8-2
  Top 1.372: CONTACTOR_P.2 38.73,73.74 Q7.5,6,7,8-4 Q7.5,6,7,8-5
N$13
  Top 0.305: R14.2 5.4,73.88 LED4.A
N$14  (via drill 0.4)
  Top 0.305: v60.01,68.58 64.14,72.71 67.81,72.71 X1.1
  Bottom 0.305: U$3.14-A0/TX3/SPDIF_OUT 38.42,68.58 v60.01,68.58
N$15
  Top 0.305: ESDCOMH.2 86.46,31.11 CCOMHP.2 84.7,31.75 RCOMHP.1
N$16
  Top 0.305: ESDCOMH.1 85.61,28.57 CCOMHN.2 84.03,28.57 RCOMHN.1
N$17  (via drill 0.4)
  Top 0.305: v60.01,69.85 63.82,73.66 71.12,73.66 73.39,71.39 X1.2
  Bottom 0.305: U$3.15-A1/RX3/SPDIF_IN 37.15,69.85 v60.01,69.85
N$18
  Top 0.305: U$3.18-A4/SDA0 24.91,65.23 32.84,65.23 33.66,66.04 54.29,66.04 63.5,75.25 73.67,75.25 X1.3
N$19
  Top 0.305: U$3.19-A5/SCL0 20.64,62.55 23.81,65.72 30.8,65.72 32.07,66.99 53.98,66.99 63.18,76.2 76.92,76.2 X1.4
N$20  (via drill 0.55, 0.8)
  Top 0.305: U$3.24-A10/TX6/SCL2 43.18,50.48 v43.18,50.8 | v57.78,58.1 64.75,58.1 67.46,60.81 83.03,60.81 84.58,62.37 91.44,62.37 91.62,62.55 91.62,68.58 90.22,69.97 89.02,69.97 87.66,71.33 X1.5
  Bottom 0.305: v43.18,50.8 46.25,53.87 48.51,53.87 52.74,58.1 v57.78,58.1
N$21  (via drill 0.55, 0.8)
  Top 0.305: U$3.25-A11/RX6/SDA2 45.4,50.16 v45.4,50.8 | v59.69,57.15 64.44,57.15 67.65,60.36 83.22,60.36 84.77,61.91 92.08,61.91 92.08,69.45 X1.6
  Bottom 0.305: v45.4,50.8 47.08,50.8 47.19,50.91 53.45,50.91 v59.69,57.15
N$22  (via drill 0.55)
  Top 0.305: X1.7 68.73,65.83 65.6,68.96 63.39,68.96 61.82,67.39 61.82,66.27 v60.33,64.77
  Bottom 0.305: U$3.40-A16/CS1 44.77,64.77 v60.33,64.77
N$23
  Bottom 0.305: U$3.32-OUT1B 73.39,60.38 X1.8
N$24  (via drill 0.55, 0.65, 0.8)
  Top 0.305: v37.78,49.85 37.78,51.44 v45.09,58.74 | v60.64,60.01 63.82,63.18 74.94,63.18 X1.9
  Bottom 0.305: U$3.9-OUT1C 29.84,49.85 v37.78,49.85 | v45.09,58.74 52.73,58.74 53.19,59.2 59.83,59.2 v60.64,60.01
N$25  (via drill 0.55)
  Top 0.305: U$3.6-OUT1D 28.57,56.2 v30.8,56.2 | v33.02,56.2 33.66,56.83 v36.2,56.83 | v45.72,60.96 45.72,60.64 v42.55,57.47 | v58.1,60.33 59.22,60.33 60.32,59.22 60.97,59.22 61.12,59.37 65.37,59.37 67.27,61.27 77.23,61.27 X1.10
  Bottom 0.305: v30.8,56.2 v33.02,56.2 | v36.2,56.83 41.91,56.83 v42.55,57.47 | v45.72,60.96 47.08,60.96 47.19,61.07 57.36,61.07 v58.1,60.33
N$26
  Top 0.305: U$3.33-MCLK2 59.37,63.5 59.37,66.36 60.43,67.42 60.49,67.42 62.61,69.53 67.81,69.53 67.83,69.52 69.55,69.52 71.75,67.31 83.5,67.31 84.64,66.17 84.64,64.65 84.82,64.47 87.17,64.47 88.52,65.83 X1.12
N$27  (via drill 0.55)
  Top 0.305: v30.8,57.47 19.68,57.47 13.58,51.37 12.9,51.37 12.28,50.75 12.28,50.06 U$3.2-OUT2 | v33.02,57.47 34.24,58.69 40.92,58.69 41.32,59.09 41.32,59.42 v42.86,60.96 | v53.98,63.82 58.03,67.87 60.3,67.87 62.6,70.17 67.82,70.17 68.02,69.97 81.85,69.97 X1.11
  Bottom 0.305: v30.8,57.47 v33.02,57.47 | v42.86,60.96 44.03,62.12 44.03,62.99 45.17,64.14 53.66,64.14 v53.98,63.82
N$28  (via drill 0.35)
  Top 0.305: v31.11,7.62 R15.1
  Bottom 0.305: v31.11,7.62 31.11,12.62 U2.27
N$29  (via drill 0.35)
  Top 0.305: v28.57,7.62 R16.1
  Bottom 0.305: v28.57,7.62 28.57,12.62 U2.28
N$30  (via drill 0.35)
  Top 0.305: v26.04,7.62 R17.1
  Bottom 0.305: v26.04,7.62 26.04,12.62 U2.29
N$31  (via drill 0.35)
  Top 0.305: v23.5,7.62 R18.1
  Bottom 0.305: v23.5,7.62 23.5,12.62 U2.30
N$32
  Top 0.305: R15.2 LED5.A
N$33
  Top 0.305: R16.2 LED6.A
N$34
  Top 0.305: R17.2 LED7.A
N$35
  Top 0.305: R18.2 LED8.A
NFAULT  (via drill 0.35)
  Top 0.305: IC1.2 63.3,19.09 60.79,21.59 R2.2 59.91,22 57.1,24.8 57.1,25.36 59.03,27.29 60.12,27.29 60.68,27.86 60.68,28.66 60.12,29.22 57.33,29.22 50.8,35.76 50.8,40.32 v48.26,42.86
  Bottom 0.305: v48.26,42.86 44.87,46.25 44.65,46.25 43.6,47.29 43.6,47.75 38.05,53.3 38.05,53.72 33.35,58.42 27.62,58.42 27.3,58.74 U$3.16-A2/RX4/SCL1
RX_ESP  (via drill 0.35 pad 1.2)
  Top 0.305: U$3.1-TX1/MISO1/CTX2 v6.99,43.5 | v7.3,32.38 13.65,26.04 13.65,15.56 14.61,14.61 36.91,14.61 U2.24
  Bottom 0.305: v6.99,43.5 6.99,32.7 v7.3,32.38
SCK  (via drill 0.35, 0.35 pad 1.2)
  Top 0.305: v61.28,16.46 61.31,16.49 IC1.6 | v42.86,21.27 36.3,21.27 36.3,34.95 37.45,36.1 37.45,39.7 36.3,40.85 v36.3,50.8 | v31.75,51.75 31.75,59.37 U$3.13-SCK/LED
  Bottom 0.305: v61.28,16.46 61.28,16.51 59.69,18.1 46.04,18.1 v42.86,21.27 | v36.3,50.8 32.7,50.8 v31.75,51.75
SCK_ESP  (via drill 0.35)
  Top 0.305: v30.8,33.66 24.13,33.66 21.03,36.76 U2.12
  Bottom 0.305: v30.8,33.66 32.5,35.36 34.17,35.36 34.91,36.1 34.91,39.7 36.35,41.13 39.88,41.13 40.65,41.91 48.27,41.91 48.94,42.58 48.94,43.15 47.62,44.46 U$3.27-A13/SCK1
SPI_RDY
  Top 0.305: R3.2 63.5,14.63 IC1.8 64.17,15.31 64.92,15.31 65.1,15.49 65.1,32.53 62.6,35.02 62.6,36.46 52.81,46.25 52.27,46.25 51.65,46.87 51.65,49.86 48.68,52.83 48.68,62.99 48.06,63.61 44.66,63.61 43.5,64.77 26.99,64.77 U$3.17-A3/TX4/SDA1
TX_ESP  (via drill 0.35 pad 1.2)
  Top 0.305: U$3.0-RX1/CS1/CRX2 v4.45,43.18 | v12.7,29.53 16.19,29.53 17.78,27.94 17.78,17.78 19.68,15.88 38.17,15.88 U2.23
  Bottom 0.305: v4.45,43.18 4.45,32.38 7.3,29.53 v12.7,29.53
VCC
  Top 0.305: TME1205S.2 59.05,33.03 61.6,30.48 61.59,30.48 C4.1 | LED4.C 5.4,70.96 4.69,71.66 4.69,78.82 7.53,81.66 10.84,81.66 13.34,84.16 | LED3.C 18.1,70.96 17.39,71.66 17.39,74.65 19.06,76.32 22.44,76.32 24,77.89 24,82 CONTACTOR_N.1 | LED2.C 30.8,70.96 30.09,71.66 30.09,74.65 31.76,76.32 35.14,76.32 36.7,77.89 36.7,82 CONTACTOR_P.1 | LED1.C 43.5,70.96 42.79,71.66 42.79,74.65 44.46,76.32 47.84,76.32 49.4,77.89 49.4,82 CONTACTOR_PRECHARGE.1
  Top 5.283: CONTACTOR_PRECHARGE.1 51.31,84.16 | CONTACTOR_PRECHARGE.1 53.88,84.03 54,84.15 61.57,84.15 61.69,84.03 PWR_IN.1 | CONTACTOR_PRECHARGE.1 48.99,84.03 48.87,84.15 41.3,84.15 41.18,84.03 CONTACTOR_P.1 36.29,84.03 36.17,84.15 28.6,84.15 28.48,84.03 CONTACTOR_N.1 23.59,84.03 23.47,84.15 13.34,84.15 13.34,84.16
  Bottom 0.508: TME1205S.2 56.97,35.42 56.97,36.32 56.62,36.67 56.62,52.47 61.59,57.45 61.59,77.23 62.2,77.84 62.2,82.1 PWR_IN.1
  pour Bottom: 0,65.52 92.51,65.52 93.34,66.36 93.34,87.63 92.71,88.27 0,88.27

## Text on the board
tPlace: DIEEEEEE!!!!!! | CAN | BMS Main Board V1.1 | Luc Ah-Hot, Joshua Feist, Lance Go, Isaac Kim / Jan 2022 | COMH | COML